# Altium PCB a10.5固件8通接收机sbus.PcbDoc
Units mm, origin at the board's own origin, x right, y up, seen from the top; angles counter-clockwise.
Board outline 25.4 x 22.35 mm, 2 copper layers (Top Layer, Bottom Layer), stack 1.271 mm thick; 21 components, 31 nets, 114 pads, 42 vias.
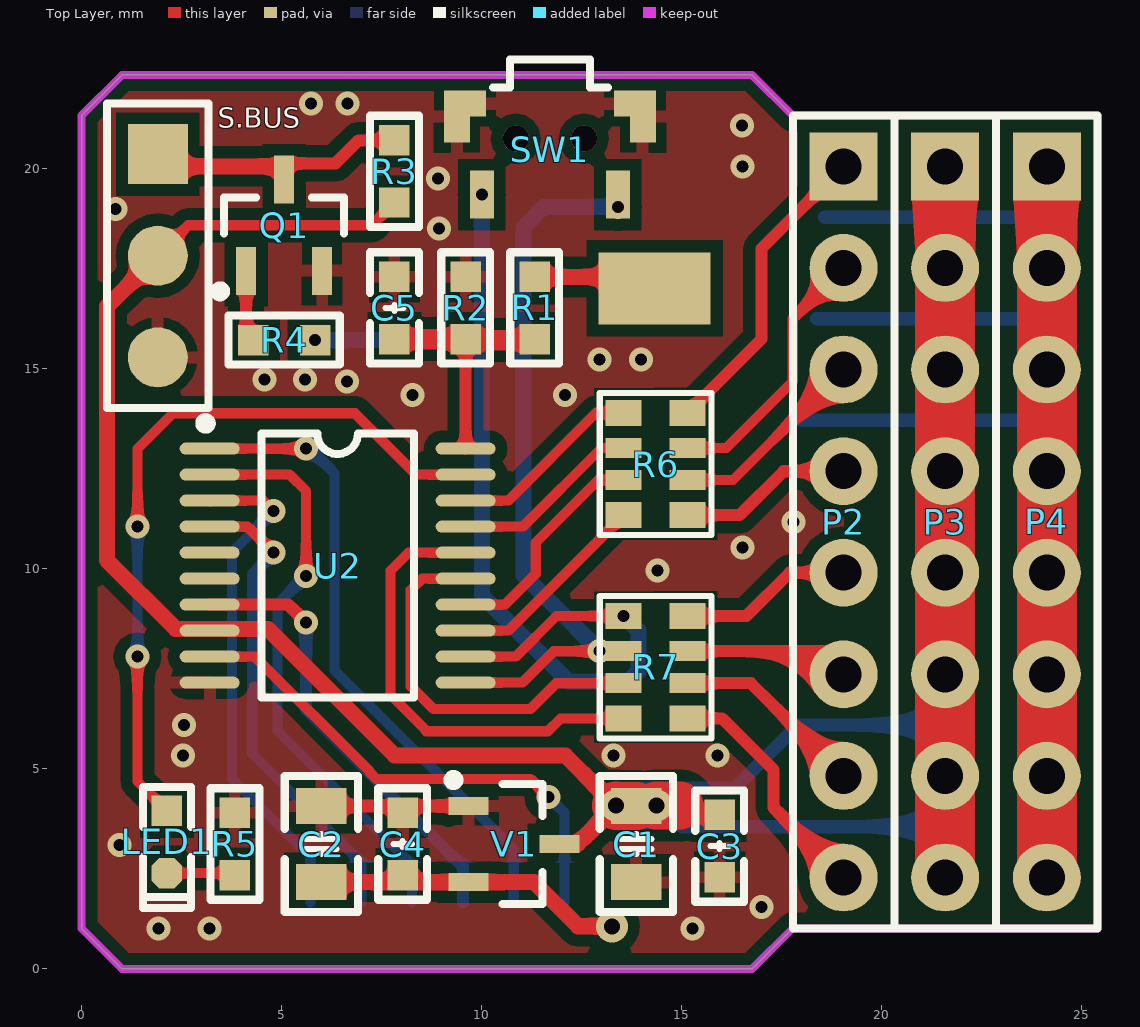
[diagram p0: Top Layer view]
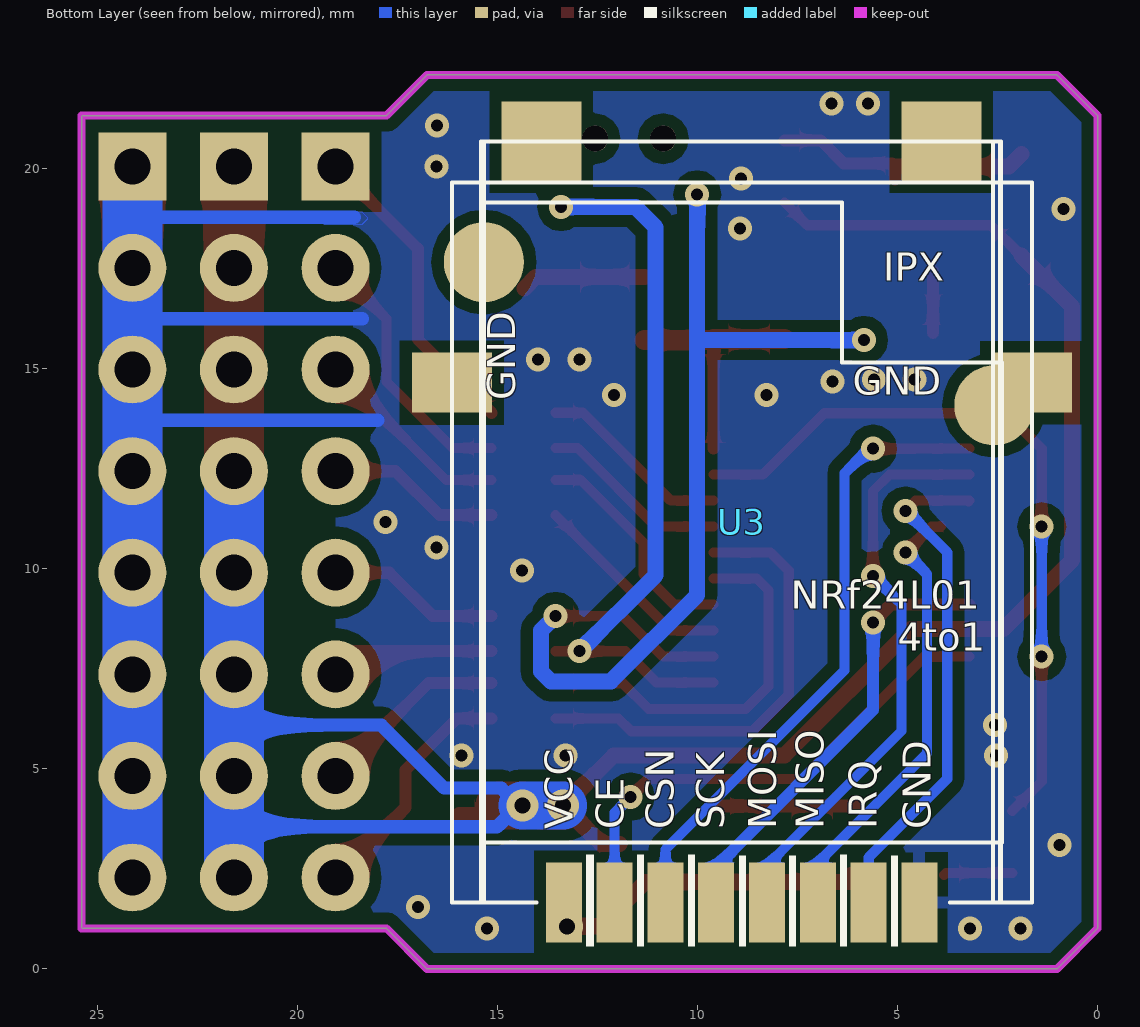
[diagram p1: Bottom Layer view, seen from below]

## Layer stack, top to bottom
Top Solder: solder mask 0.0102, Solder Resist, Dk 3.5
Top Layer: signal copper 0.0356
Dielectric1: core 1.2, FR-4, Dk 4.8
Bottom Layer: signal copper 0.0356
Bottom Solder: solder mask 0.0102, Solder Resist, Dk 3.5

## Board outline
0,1.016 1.016,0 16.764,0 17.78,1.016 25.4,1.016 25.4,21.336 17.78,21.336 16.764,22.352 1.016,22.352 0,21.336

## Design rules (kind name [scope] priority, off if disabled: settings)
Clearance Clearance_polygon [InPolygon] p1: gap=0.3 ignorepadtopadclearanceinfootprint=FALSE
Clearance [All] p2: gap=0.2 ignorepadtopadclearanceinfootprint=FALSE
ComponentClearance [All] p1 off: gap=0.254 collisioncheckmode=3 verticalgap=0.254 showdistances=FALSE
PolygonConnect PolygonConnect_GND [InNet('GND')] p1: thpad.connectstyle=Direct thpad.reliefconductorwidth=0.254 thpad.reliefentries=4 thpad.polygonreliefangle="90 Angle" thpad.airgapwidth=0.254 smdpad.connectstyle=Relief smdpad.reliefconductorwidth=0.3 smdpad.reliefentries=4 smdpad.polygonreliefangle="90 Angle" smdpad.airgapwidth=0.254 via.connectstyle=Direct via.reliefconductorwidth=0.254 via.reliefentries=4 via.polygonreliefangle="90 Angle" via.airgapwidth=0.254
PolygonConnect [All] p2: connectstyle=Relief reliefconductorwidth=0.254 reliefentries=4 polygonreliefangle="90 Angle" airgapwidth=0.254
RoutingVias [All] p1: holewidth=0.711 width=1.27 viastyle="Through Hole" minholewidth=0.711 minwidth=1.27 maxholewidth=0.711 maxwidth=1.27
SilkToSolderMaskClearance SilkscreenOverComponentPads [IsPad] p1: minsilkscreentomaskgap=0.254 clearancetoexposedcopper=TRUE
SolderMaskExpansion [All] p1: expansion=0.102 istentingtop=FALSE
Width [All] p1: maxlimit=2 minlimit=0.254 preferedwidth=0.254
28 further rules are at their usual default settings.

## Components (designator, comment, footprint, x,y, rotation, side; value= is the part's Value field where it differs from the comment)
C1 "10V10uF" "C 0805_L" 13.868,3.124 r90 top
C2 "10V10uF" "C 0805_L" 5.994,3.124 r270 top
C3 "104" "C 0603_L" 15.951,3.073 r90 top
C4 "104" "C 0603_L" 8.026,3.124 r270 top
C5 "10nf" "C 0603_L" 7.823,16.525 r90 top
LED1 "蓝色" "LED 0603B" 2.134,3.175 r270 top
P2 "Header 8" HDR2.54-LI-8P 19.05,11.176 r270 top
P3 "Header 8" HDR2.54-LI-8P 21.59,11.176 r270 top
P4 "Header 8" HDR2.54-LI-8P 24.13,11.176 r270 top
Q1 "S9013" SOT23-3N 5.064,18.593 r0 top
R1 "20K" "R 0603_L" 11.328,16.525 r270 top
R2 "10K" "R 0603_L" 9.601,16.525 r270 top
R3 "10K" "R 0603_L" 7.823,19.939 r270 top
R4 "1K" "R 0603_L" 5.064,15.723 r180 top
R5 "1K" "R 0603_L" 3.835,3.124 r270 top
R6 "103" RCA-8P4R-0603 14.351,12.624 r270 top
R7 "103" RCA-8P4R-0603 14.351,7.544 r270 top
SW1 "3x6x5" SW_1 11.709,20.498 r0 top
U2 "STC15W401AS_SOP20_DIP20 _TSSOP20" TSSOP20_N 6.401,10.084 r0 top
U3 "nrf24l01" NRF24L01_4TO1 8.89,11.176 r180 bottom
V1 "662K" SOT23-3L 10.82,3.124 r270 top

## Footprints (in the part's own frame and the unit in brackets; to place one, negate y for a bottom-side part, rotate by r counter-clockwise, add the part's x,y. Pads: shape width x height; smd on the part's side, far side on the other; paste and mask are expansions set on the pad)
"C 0603_L" [mil]
  rect 30x30 smd: 1(-30.59,0) 2(30.59,0)
  silkscreen extent -55,-24 55,24, body extent -31,-16 31,16, height 32
"C 0805_L" [mil]
  rect 35x50 smd: 1(-37.4,0) 2(37.4,0)
  silkscreen extent -67,-36 67,36, body extent -39,-24 39,24, height 20
HDR2.54-LI-8P [mm]
  rect 1.7x1.7 hole 0.9: 1(-8.89,0)
  round 1.7 hole 0.9: 2(-6.35,0) 3(-3.81,0) 4(-1.27,0) 5(1.27,0) 6(3.81,0) 7(6.35,0) 8(8.89,0)
  silkscreen extent -10.16,-1.27 10.16,1.27, body extent -10.16,-1.27 10.16,1.27, height 8.5
"LED 0603B" [mil]
  rect 30x30 smd: 1(-30.59,0)
  oct 30x30 smd: 2(30.59,0)
  silkscreen extent -54,-24 65,24, body extent -31,-16 32,16, height 24
NRF24L01_4TO1 [mm]
  rect 2x1.5 smd: 0(-7.25,3.482) 0(7.25,3.482)
  round 2 smd: 0(-6.452,6.495) 0(6.308,2.915)
  rect 0.9x2 smd: 1(-4.453,-9.512) 2(-3.183,-9.512) 3(-1.913,-9.512) 4(-0.643,-9.512) 5(0.627,-9.512) 6(1.897,-9.512) 7(3.167,-9.512) 8(4.437,-9.512)
  rect 2x2 smd: 9(-5.015,9.512) 10(4.985,9.512)
  silkscreen extent -7.25,-10.61 7.25,9.51
"R 0603_L" [mil]
  rect 30x30 smd: 1(-30.59,0) 2(30.59,0)
  silkscreen extent -55,-24 55,24, body extent -31,-16 32,16, height 16
RCA-8P4R-0603 [mm]
  rect 0.65x0.9 smd: 1(-1.28,-0.8) 4(1.28,-0.8) 5(1.28,0.8) 8(-1.28,0.8)
  rect 0.5x0.9 smd: 2(-0.4,-0.8) 3(0.4,-0.8) 6(0.4,0.8) 7(-0.4,0.8)
  silkscreen extent -1.78,-1.4 1.78,1.4, body extent -1.6,-0.8 1.6,0.8, height 0.6
SOT23-3L [mm]
  rect 0.45x1 smd: 1(-0.95,-1.143) 2(0.95,-1.143) 3(0,1.125)
  silkscreen extent -1.72,-1.65 1.5,0.7, body extent -1.5,-1.2 1.5,1.2, height 1.05
SOT23-3N [mm]
  rect 0.5x1.2 smd: 1(-0.95,-1.143) 2(0.95,-1.143) 3(0,1.143)
  silkscreen extent -1.72,-1.78 1.5,0.7, body extent -1.5,-1.2 1.5,1.2, height 1.05
SW_1 [mm]
  rect 0.65x1.3 smd: 0(-2.325,0.813) 0(2.325,0.813)
  rect 0.4x0.65 smd: 0(-1.8,1.138) 0(1.8,1.138)
  round 0.65 hole 0.65: 0(-0.85,0.263) 0(0.85,0.263)
  rect 0.6x1.2 smd: 1(-1.7,-1.137) 2(1.7,-1.137)
  silkscreen extent -1.43,1.54 1.45,2.24, body extent -2.35,-1.3 2.35,2.35, height 1.9
TSSOP20_N [mm]
  oval 1.5x0.3 smd: 1(-3.2,2.925) 2(-3.2,2.275) 3(-3.2,1.625) 4(-3.2,0.975) 5(-3.2,0.325) 6(-3.2,-0.325) 7(-3.2,-0.975) 8(-3.2,-1.625) 9(-3.2,-2.275) 10(-3.2,-2.925) 11(3.2,-2.925) 12(3.2,-2.275) 13(3.2,-1.625) 14(3.2,-0.975) 15(3.2,-0.325) 16(3.2,0.325) 17(3.2,0.975) 18(3.2,1.625) 19(3.2,2.275) 20(3.2,2.925)
  silkscreen extent -3.43,-3.3 1.9,3.69, body extent -3.2,-3.25 3.2,3.25, height 1.03

## Part data
LED1: library part LED-SMD
P2 P3 P4: "H"
Q1: library part 9013-SMD
SW1: library part "TSW 3x6"
U2: library part "STC15W401AS_SOP20_DIP20 _TSS"
V1: library part 66

## Free pads (board coordinates)
  rect 1.5x1.5 smd: 0(1.905,20.371)
  round 1.5 smd: 1(1.905,17.831) 2(1.905,15.291)
  rect 2.8x1.8 smd: 1(14.326,17.018)

## Via types
v1: diameter 0.6, hole 0.3, Top Layer to Bottom Layer, tented both sides, 39 vias
v2: diameter 0.8, hole 0.4, Top Layer to Bottom Layer, tented both sides, 2 vias
v3: diameter 0.8, hole 0.4, Top Layer to Bottom Layer, tented top, 1 vias

## Nets (pads, with @x,y where several pads share a name; then routed paths per layer and width w, separated by ;. In a path a pad name is that pad's centre, name@x,y a point inside that pad or via, vN(x,y) a via of type N, cw(c..) or ccw(c..) an arc to the next point about the centre after c; other vN are vias at no path point)
3.3V: C2.2 C4.2 U3.1 V1.2 | length 8
  Top Layer w0.4: C2.2@6.167,2.347 C2.2 V1.2 11.309,2.174 12.416,1.067 v3(13.259,1.067)
3S: pad.1@14.326,17.018 R1.1 | length 3.1
  Top Layer w0.4: R1.1 14.042,17.302 pad.1@14.326,17.018
ADC: C5.1 R1.2 R2.2 U2.20 | length 6.2
  Top Layer w0.3: U2.20 R2.2
  Top Layer w0.5: C5.1 R2.2 ; R2.2@9.601,15.723 R1.2@11.328,15.723
CE: U2.9 U3.2 | length 12.7
  Top Layer w0.254: U2.9 4.332,7.809 7.214,4.928 7.214,4.902 7.366,4.75 11.227,4.75 v1(11.671,4.305)
  Bottom Layer w0.254: v1(11.671,4.305) 12.073,3.904 12.073,2.481 U3.2
CH1: R6.1 U2.18 | length 4.9
  Top Layer w0.254: U2.18 10.667,11.709 12.862,13.904 R6.1
CH2: R6.2 U2.17 | length 4.8
  Top Layer w0.254: U2.17 11.033,11.059 12.998,13.024 R6.2
CH3: R6.3 U2.14 | length 5.7
  Top Layer w0.254: U2.14 10.582,9.109 11.354,9.881 11.354,10.661 12.917,12.224 R6.3
CH4: R6.4 U2.13 | length 5.1
  Top Layer w0.254: U2.13 10.666,8.459 R6.4
CH5: R4.1 R7.1 SW1.1 U2.12 | length 25
  Top Layer w0.254: U2.12 10.857,7.809 11.872,8.824 v1(13.551,8.824)
  Bottom Layer w0.254: 9.984,15.723 10.009,15.748 ; v1(10.009,19.36) v1@10.009,19.38
  Bottom Layer w0.4: v1(5.841,15.723) 9.984,15.723 ; v1(10.009,19.36) 10.009,15.748 10.009,9.345 12.167,7.188 13.665,7.188 13.919,7.442 13.919,8.456 v1(13.551,8.824)
CH6: R7.2 SW1.2 U2.11 | length 18.2
  Top Layer w0.254: U2.11 11.02,7.159 11.805,7.944 v1(12.954,7.944) R7.2
  Bottom Layer w0.4: v1(12.954,7.944) 11.049,9.849 11.049,18.542 11.557,19.05 v1(13.411,19.05)
CH7: R7.3 U2.15 | length 9.7
  Top Layer w0.254: U2.15 8.514,9.759 8.23,9.474 8.23,7.068 8.796,6.502 11.227,6.502 11.868,7.144 R7.3
CH8: R7.4 U2.16 | length 11.5
  Top Layer w0.254: 8.611,5.944 11.633,5.944 ; 8.636,5.944 7.722,6.858 7.722,9.957 8.174,10.409 U2.16 ; 11.659,5.944 11.979,6.264 R7.4
CSN: U2.1 U3.3 | length 16
  Top Layer w0.254: U2.1 4.576,13.009 4.58,13.005 v1@5.613,13.005
  Bottom Layer w0.254: v1(5.613,13.009) 5.711,13.009 6.325,12.395 6.325,7.468 10.803,2.989 U3.3
GND: C1.1 C2.1 C3.1 C4.1 C5.2 P4.1 P4.2 P4.3 P4.4 P4.5 P4.6 P4.7 P4.8 pad.2 Q1.2 R2.1 R5.1 SW1.0@9.384,21.31 SW1.0@9.909,21.635 SW1.0@13.509,21.635 SW1.0@14.034,21.31 U2.10 U3.8 V1.1 | length 56.7
  Top Layer w0.33: C2.1 V1.1
  Top Layer w1.5: P4.8 P4.7 P4.6 P4.5 P4.4 P4.3 P4.2 P4.1
  Bottom Layer w0.33: 17.996,13.716 24.13,13.716 ; 18.379,16.256 24.13,16.256 ; 18.576,18.795 24.102,18.795 24.13,18.767
  Bottom Layer w1.5: P4.8 P4.7 P4.6 P4.5 P4.4 24.13,13.716 P4.3 24.13,16.256 P4.2 24.13,18.767 P4.1
  other v1: 1.924,1.016 3.194,1.016 15.27,1.016 16.993,1.551 0.949,3.105 2.537,5.337 13.3,5.337 15.901,5.337 2.559,6.096 14.395,9.957 16.529,10.541 17.799,11.176 8.274,14.351 12.084,14.351 6.633,14.688 4.572,14.732 5.588,14.732 12.954,15.24 13.989,15.234 8.942,18.506 0.851,19.004 8.909,19.76 16.529,20.066 16.51,21.082 5.734,21.635 6.651,21.635
IRQ: U2.3 U3.7 | length 12.8
  Top Layer w0.254: U2.3@3.226,11.684 U2.3 4.547,11.709 v1(4.801,11.455)
  Bottom Layer w0.254: v1(4.801,11.455) 3.759,10.414 3.759,4.753 5.723,2.789 U3.7
LED: LED1.1 U2.19 | length 18.6
  Top Layer w0.254: v1(1.397,7.809) 1.397,4.689 LED1.1 ; v1(1.397,11.059) 1.397,13.005 2.286,13.894 6.833,13.894 8.368,12.359 U2.19
  Bottom Layer w0.254: v1(1.397,7.809) v1(1.397,11.059)
MISO: U2.4 U3.6 | length 11.3
  Top Layer w0.254: U2.4@3.912,11.059 4.151,11.059 v1(4.801,10.409)
  Bottom Layer w0.254: v1(4.801,10.409) 4.267,9.875 4.267,5.385 6.993,2.659 U3.6
MOSI: U2.2 U3.5 | length 14.6
  Top Layer w0.254: U2.2 5.203,12.359 5.613,11.948 v1(5.613,9.83)
  Bottom Layer w0.254: v1(5.613,9.83) 4.902,9.119 4.902,5.949 8.263,2.588 U3.5
NetLED1_2: LED1.2 R5.2 | length 1.7
  Top Layer w0.254: LED1.2 3.785,2.398 R5.2
NetP2_1: P2.1 R6.8 | length 7.8
  Top Layer w0.3: R6.8 16.993,15.745 16.993,15.977 16.993,18.009 P2.1
NetP2_2: P2.2 R6.7 | length 6.7
  Top Layer w0.254: R6.7 16.116,13.024 17.78,14.688 17.78,16.256 P2.2
NetP2_3: P2.3 R6.6 | length 5
  Top Layer w0.254: R6.6 16.288,12.224 P2.3
NetP2_4: P2.4 R6.5 | length 4.4
  Top Layer w0.3: R6.5 16.449,11.344 17.551,12.446 P2.4
NetP2_5: P2.5 R7.8 | length 4.3
  Top Layer w0.3: R7.8 16.622,8.824 17.704,9.906 P2.5
NetP2_6: P2.6 R7.7 | length 4.1
  Top Layer w0.3: R7.7 18.472,7.944 P2.6
NetP2_7: P2.7 R7.6 | length 4.9
  Top Layer w0.3: R7.6 16.732,7.144 17.272,6.604 P2.7
NetP2_8: P2.8 R7.5 | length 6.1
  Top Layer w0.3: R7.5 16.012,6.264 17.297,4.978 17.297,4.039 P2.8
NetQ1_1: Q1.1 R4.2 | length 1.6
  Top Layer w0.3: R4.2@4.114,15.896 Q1.1
S.BUS: pad.0 Q1.3 R3.1 | length 6.6
  Top Layer w0.3: Q1.3 5.064,20.066 5.14,20.142 6.35,20.142 6.924,20.716 R3.1
  Top Layer w0.4: pad.0 2.21,20.066 Q1.3@5.064,20.066
SCK: U2.7 U3.4 | length 11.2
  Top Layer w0.3: U2.7 5.166,9.109 v1(5.613,8.661)
  Bottom Layer w0.3: v1(5.613,8.661) 5.613,6.477 9.533,2.557 U3.4
VCC: C1.2 C3.2 P3.1 P3.2 P3.3 P3.4 P3.5 P3.6 P3.7 P3.8 pad.1@1.905,17.831 R3.2 U2.8 V1.3 | length 78.6
  Top Layer w0.254: pad.1@1.905,17.831 2.667,18.593 7.254,18.593 R3.2
  Top Layer w0.4: pad.1@1.905,17.831 0.635,16.561 0.635,10.22 2.351,8.505 4.659,8.505 7.827,5.337 12.098,5.337 C1.2@13.36,4.074 ; V1.3 12.41,3.124 C1.2@13.36,4.074 ; C1.2 C1.2@13.36,4.074 ; 14.95,4.089 15.189,3.85 C3.2
  Top Layer w1.2: v2(13.36,4.089) 13.376,4.074 C1.2 ; v2(14.376,4.089) 14.95,4.089
  Top Layer w1.5: P3.8 P3.7 P3.6 P3.5 P3.4 P3.3 P3.2 P3.1
  Bottom Layer w0.33: 21.59,3.556 15.011,3.556 14.478,4.089 14.91,4.521 16.332,4.521 17.907,6.096 21.59,6.096
  Bottom Layer w1.2: v2(13.36,4.089) v2(14.376,4.089)
  Bottom Layer w1.5: P3.8 21.59,3.556 P3.7 21.59,6.096 P3.6 P3.5 P3.4
pads on no net: SW1.0@10.859,20.76 SW1.0@12.559,20.76 U2.5 U2.6 U3.0 U3.9 U3.10

## Polygon pours and split planes (outlines as drawn)
GND on Bottom Layer "Top Layer-No Net" (solid, remove dead copper, pour order 8): 19.05,22.352 0,22.352 0,0 19.05,0
GND on Bottom Layer "NONET_L-01_P-001" (solid, remove dead copper, pour order 11): 19.36,18.641 19.333,18.614 18.383,18.614 18.23,18.767 18.379,18.916 18.929,18.916 19.05,18.795
GND on Top Layer "Top Layer-No Net" (solid, remove dead copper, pour order 10): 19.05,22.352 0,22.352 0,0 19.05,0

## Keep-outs
Keep-Out Layer:
  the board outline again, w0.2

## Silkscreen, mask and mechanical layers (free items; w line width, h text height)
Top Overlay:
  lines w0.2: 0.635,14.018 0.635,21.641 3.175,21.641 3.175,14.018 0.635,14.018
  text "S.BUS" at 3.406,21.028 h0.5
Bottom Solder:
  drawing of 334 lines, arcs and shapes, not listed
Mechanical 1:
  the board outline again, w0.2

## Text inside footprints (layer, text, board x,y; h text height)
U3: Bottom Overlay "IPX" at 5.359,16.967 h1.2; Bottom Overlay "NRf24L01" at 7.671,8.763 h1.2; Bottom Overlay "4to1" at 4.993,7.722 h1.2; Bottom Overlay "VCC" at 12.878,3.49 h1.2 r270; Bottom Overlay "GND" at 14.326,14.224 h1.2 r270; Bottom Overlay "CE" at 11.608,3.489 h1.2 r270; Bottom Overlay "CSN" at 10.363,3.489 h1.2 r270; Bottom Overlay "SCK" at 9.093,3.489 h1.2 r270; Bottom Overlay "MOSI" at 7.798,3.489 h1.2 r270; Bottom Overlay "MISO" at 6.604,3.489 h1.2 r270; Bottom Overlay "IRQ" at 5.283,3.489 h1.2 r270; Bottom Overlay "GND" at 3.937,3.489 h1.2 r270; Bottom Overlay "GND" at 6.121,14.122 h1.2